# EAGLE board SPIShortcut (EAGLE 6.4)
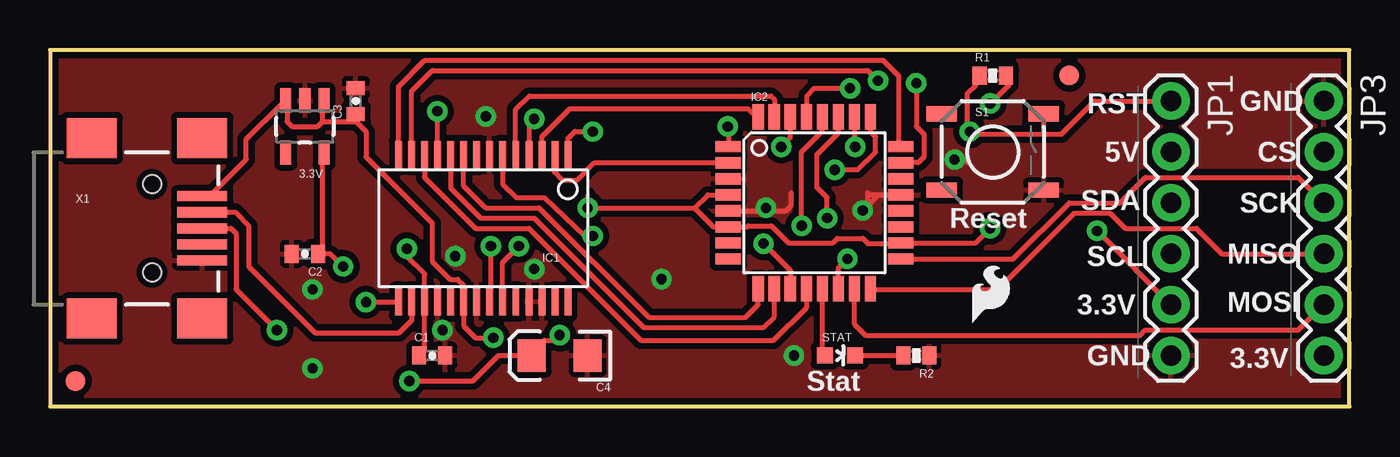
[diagram p0: board, top side]
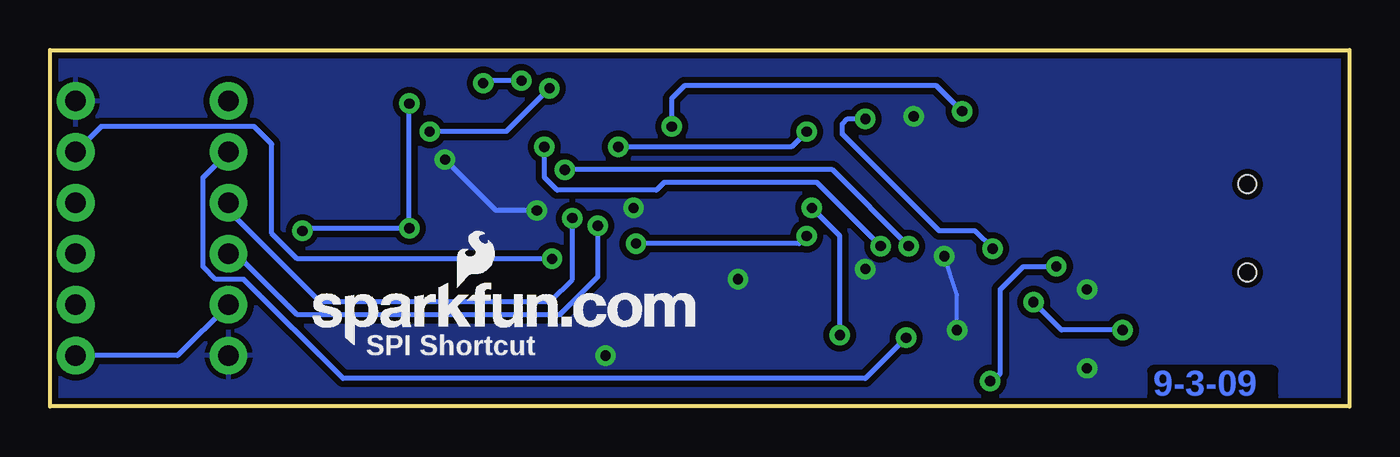
[diagram p1: board, bottom side, seen from below]

Size 64.77 x 17.78 mm. Coordinates in mm from the lower left corner, seen from the top.
Outline: 0,0 64.77,0 64.77,17.78 0,17.78 0,0
Copper layers (1*16): Top 0.035mm / dielectric 1.5mm / Bottom 0.035mm
Design rules "SparkFun": minimum track width 8mil, minimum drill 20mil, track to track 8mil, track to pad 8mil, pad to pad 8mil, via to via 8mil, smd to smd 8mil, copper to edge 9mil, drill to drill 8mil, minimum pad ring 12mil, minimum via ring 10mil, stop-mask expansion 4mil, vias tented up to drill 25mil, thermal gap 10mil

## Footprints (pad centres in the part's own frame; a part is rotated, then mirrored left to right if it is on the bottom)
SOT23-5 = smd 0.55 x 1.2: 1 -0.95,-1.3; 2 0,-1.3; 3 0.95,-1.3; 4 0.95,1.3; 5 -0.95,1.3
0402-CAP = smd 0.7 x 0.9: 1 -0.65,0; 2 0.65,0
EIA3216 = smd 1.4 x 1.6: A 1.4,0; C -1.4,0
SSOP28DB = smd 0.348 x 1.397: 1 -4.225,-3.656; 2 -3.575,-3.656; 3 -2.925,-3.656; 4 -2.275,-3.656; 5 -1.625,-3.656; 6 -0.975,-3.656; 7 -0.325,-3.656; 8 0.325,-3.656; 9 0.975,-3.656; 10 1.625,-3.656; 11 2.275,-3.656; 12 2.925,-3.656; 13 3.575,-3.656; 14 4.225,-3.656; 15 4.225,3.656; 16 3.575,3.656; 17 2.925,3.656; 18 2.275,3.656; 19 1.625,3.656; 20 0.975,3.656; 21 0.325,3.656; 22 -0.325,3.656; 23 -0.975,3.656; 24 -1.625,3.656; 25 -2.275,3.656; 26 -2.925,3.656; 27 -3.575,3.656; 28 -4.225,3.656
TQFP32-08 = smd 1.27 x 0.559: 1 -4.293,2.8; 2 -4.293,2; 3 -4.293,1.2; 4 -4.293,0.4; 5 -4.293,-0.4; 6 -4.293,-1.2; 7 -4.293,-2; 8 -4.293,-2.8; 17 4.293,-2.8; 18 4.293,-2; 19 4.293,-1.2; 20 4.293,-0.4; 21 4.293,0.4; 22 4.293,1.2; 23 4.293,2; 24 4.293,2.8 | smd 0.559 x 1.27: 9 -2.8,-4.293; 10 -2,-4.293; 11 -1.2,-4.293; 12 -0.4,-4.293; 13 0.4,-4.293; 14 1.2,-4.293; 15 2,-4.293; 16 2.8,-4.293; 25 2.8,4.293; 26 2,4.293; 27 1.2,4.293; 28 0.4,4.293; 29 -0.4,4.293; 30 -1.2,4.293; 31 -2,4.293; 32 -2.8,4.293
1X06 = drill 1.016 pad 1.88: 1 0,0; 2 2.54,0; 3 5.08,0; 4 7.62,0; 5 10.16,0; 6 12.7,0
0402-RES = smd 0.7 x 0.9: 1 -0.65,0; 2 0.65,0
TACTILE_SWITCH_SMD = smd 1.524 x 0.762: 1 -2.54,1.905; 2 2.54,1.905; 3 -2.54,-1.905; 4 2.54,-1.905
LED-0603 = smd 0.8 x 0.8: A 0,-0.75; C 0,0.75
FIDUCIAL-1X2 = smd 1 x 1: 1 0,0
USB-MINIB = smd 2.5 x 0.5: D+ 2.5,0; D- 2.5,0.8; GND 2.5,-1.6; ID 2.5,-0.8; VBUS 2.5,1.6 | smd 2.5 x 2: GND@1 -3,-4.5; GND@2 -3,4.5; GND@3 2.5,4.5; GND@4 2.5,-4.5 | hole 0.9: 0,2.2; 0,-2.2

## Placement (x,y rotation side)
3.3V  V_REG_LDOSMD  [SOT23-5]  12.7,13.97 180 top
C1  0.1u  [0402-CAP]  19.05,2.54 0 top
C2  0.1u  [0402-CAP]  12.7,7.62 180 top
C3  10n  [0402-CAP]  15.24,15.24 90 top
C4  10u  [EIA3216]  25.4,2.54 180 top
IC1  FT245RL  [SSOP28DB]  21.59,8.89 180 top
IC2  ATMEGA168  [TQFP32-08]  38.1,10.16 0 top
JP1  [1X06]  55.88,15.24 270 top
JP3  [1X06]  63.5,15.24 270 top
R1  10k  [0402-RES]  46.99,16.51 0 top
R2  330  [0402-RES]  43.18,2.54 180 top
S1  [TACTILE_SWITCH_SMD]  46.99,12.7 0 top
STAT  RED  [LED-0603]  39.37,2.54 270 top
U$3  LOGO-SFENEW  [SFE-NEW-WEBLOGO]  51.69,3.05 0 bottom
U$5  FIDUCIAL1X2  [FIDUCIAL-1X2]  1.27,1.27 0 top
U$6  FIDUCIAL1X2  [FIDUCIAL-1X2]  50.8,16.51 0 top
U$7  LOGO-SFESK  [SFE-LOGO-FLAME]  45.97,4.19 0 top
X1  USBSMD  [USB-MINIB]  5.08,8.89 0 top

## Library data of the parts
3.3V C1-C4 IC1 IC2 JP1 JP3 R1 R2 S1 STAT U$3 U$5-U$7 X1 = SparkFun

## Nets
3.3V: 3.3V.5 C2.1 C4.A IC2.4 IC2.6 IC2.18 JP1.5 JP3.6 R1.2
CS: IC2.14 JP3.2
GND: 3.3V.2 C1.2 C2.2 C3.2 C4.C IC1.7 IC1.18 IC1.21 IC1.25 IC1.26 IC2.3 IC2.5 IC2.21 JP1.6 JP3.1 R2.1 S1.4 X1.GND
IOVDD: C1.1 IC1.4 IC1.17
MISO: IC2.16 JP3.4
MOSI: IC2.15 JP3.5
N$1: IC1.1 IC2.30
N$2: IC1.5 IC2.31
N$3: IC1.3 IC2.32
N$4: IC1.11 IC2.1
N$5: IC1.2 IC2.2
N$6: IC1.9 IC2.9
N$7: IC1.10 IC2.10
N$8: IC1.6 IC2.11
N$9: IC1.23 IC2.26
N$10: IC1.16 X1.D-
N$11: IC1.15 X1.D+
N$12: IC1.22 IC2.25
N$13: IC1.14 IC2.24
N$14: IC1.13 IC2.23
N$15: IC1.12 IC2.12
N$16: IC2.13 STAT.A
N$17: R2.2 STAT.C
RESET: IC2.29 JP1.1 R1.1 S1.2
SCK: IC2.17 JP3.3
SCL: IC2.28 JP1.4
SDA: IC2.27 JP1.3
VUSB: 3.3V.1 3.3V.3 C3.1 IC1.20 JP1.2 X1.VBUS

## Tracks (layer width: path | path; a pad name or v marks a point on that pad's centre or on a via)
3.3V  (via drill 0.51)
  Top 0.203: v26.8,9.91 26.8,10.56
  Top 0.254: 3.3V.5 13.59,12.61 13.59,7.87 13.34,7.62 C2.1 13.97,7.62 v14.61,6.99 | R1.2 47.62,16.76 | v46.86,8.89 46.13,8.16 IC2.18 42.42,8.13 40.77,8.13 40.51,8.38 39.24,8.38 39.02,8.16 36.81,8.16 35.95,9.02 34.8,9.02 34.74,8.96 IC2.6 33.08,8.96 32.13,9.91 | R1.2 47.88,16.76 | v25.4,3.56 25.4,3.3 24.64,3.3 C4.A 22.35,2.54 21.08,1.27 v17.91,1.27 | 27.05,9.91 v26.8,9.91 32.13,9.91 | v52.2,8.76 JP1.5 | R1.2 47.84,16.09 v46.86,15.11 | IC2.4 32.78,10.56 32.13,9.91
  Bottom 0.254: v46.86,15.11 v46.86,8.89 52.07,8.89 v52.2,8.76 | v25.4,3.56 25.4,8.51 v26.8,9.91 | JP3.6 58.42,2.54 JP1.5 | v14.61,6.99 16.26,6.99 17.4,5.84 17.4,1.65 17.65,1.4 | 17.65,1.4 17.78,1.27 | v17.91,1.27 17.78,1.4 17.65,1.4
CS  (via drill 0.51)
  Top 0.254: IC2.14 39.3,6.92 v39.75,7.37
  Bottom 0.254: v39.75,7.37 52.45,7.37 53.72,8.64 53.72,13.08 54.61,13.97 62.23,13.97 JP3.2
GND  (via drill 0.51)
  Top 0.254: IC2.5 36.68,9.76 36.96,10.03 36.96,10.67 | v45.09,12.32 45.59,12.32 45.72,12.19 | 41.29,10.56 IC2.21 40.88,10.56 40.77,10.67 40.77,10.03 v40.51,9.78 41.29,10.56
  Bottom 0.203: v19.56,3.81 19.56,5.59 v20.19,7.49
  Bottom 0.254: v40.51,9.78 42.55,9.78 v45.09,12.32
  other vias: 13.08,5.84 13.08,1.91 24.13,6.86 21.72,14.48 35.69,9.91 30.48,6.35 37.08,2.54
  pour Bottom (isolate 0.305): 0,17.78 64.77,17.78 64.77,0 0,0
  pour Top (isolate 0.305): 0,17.78 64.77,17.78 64.77,0 0,0
IOVDD  (via drill 0.51)
  Top 0.254: C1.1 18.41,2.54 18.66,2.79 IC1.17 18.66,5.21 18.67,5.21 18.67,6.6 17.78,7.49 v17.78,7.87 | IC1.4 23.86,14.09 v24.13,14.35
  Bottom 0.254: v24.13,14.35 25.02,14.35 25.27,14.1 25.27,13.59 20.45,8.76 18.67,8.76 v17.78,7.87
MISO
  Top 0.254: JP3.4 58.42,7.62 57.15,8.89 53.59,8.89 52.83,9.65 51.05,9.65 47.24,5.84 41.02,5.84 41,5.87 IC2.16
MOSI
  Top 0.254: IC2.15 40.1,4.1 40.64,3.56 54.36,3.56 54.61,3.81 62.23,3.81 JP3.5
N$1  (via drill 0.51)
  Top 0.254: IC2.30 36.9,13.4 v36.45,12.95 | v27.05,13.72 26.16,13.72 25.82,13.37 IC1.1
  Bottom 0.254: v36.45,12.95 27.81,12.95 v27.05,13.72
N$2
  Top 0.254: IC2.31 36.1,15.34 35.94,15.49 23.88,15.49 23.21,14.83 IC1.5
N$3
  Top 0.254: IC1.3 24.52,12.57 24.51,12.57 24.51,13.46 25.91,14.86 34.8,14.86 35.2,14.45 IC2.32
N$4  (via drill 0.51)
  Top 0.254: IC2.1 33.81,13.95 v33.78,13.97 | IC1.11 19.32,14.72 v19.3,14.73
  Bottom 0.254: v33.78,13.97 33.78,15.37 33.15,16 20.57,16 v19.3,14.73
N$5
  Top 0.254: IC2.2 27.15,12.16 26.29,11.3 25.53,11.3 25.15,11.68 25.15,12.45 25.16,12.46 IC1.2
N$6
  Top 0.254: IC1.9 20.61,11.01 21.72,9.91 24.38,9.91 29.84,4.45 34.67,4.45 35.3,5.07 IC2.9
N$7
  Top 0.254: IC1.10 19.96,10.9 21.46,9.4 24.13,9.4 29.59,3.94 35.56,3.94 36.1,4.48 IC2.10
N$8  (via drill 0.51)
  Top 0.254: 36.83,5.71 36.96,5.84 36.93,5.87 IC2.11 36.9,6.79 v35.56,8.13 | IC1.6 22.57,11.09 23.24,10.41 24.64,10.41 26.67,8.51 v27.05,8.51
  Bottom 0.254: v35.56,8.13 27.43,8.13 v27.05,8.51
N$9  (via drill 0.51)
  Top 0.254: IC1.23 22.57,7.2 v23.37,8 | IC2.26 40.1,14.38 40.13,14.35 v40.13,12.95
  Bottom 0.254: v23.37,8 26.54,11.18 34.16,11.18 34.54,10.79 39.5,10.79 40.13,11.43 v40.13,12.95
N$10
  Top 0.254: X1.D- 9.23,9.69 9.91,9.02 9.91,6.99 13.21,3.68 17.4,3.68 18.03,4.32 18.03,5.08 18.02,5.1 IC1.16
N$11  (via drill 0.51)
  Top 0.254: X1.D+ 9.02,8.89 9.27,8.64 9.27,5.84 v11.3,3.81 | IC1.15 17.4,5.21 v15.75,5.21
  Bottom 0.254: v11.3,3.81 14.35,3.81 v15.75,5.21
N$12  (via drill 0.51)
  Top 0.254: IC1.22 21.97,5.29 v21.97,8 | v39.12,11.81 40.26,11.81 41.15,12.7 41.15,13.46 40.89,13.72 40.89,14.48 40.9,14.47 IC2.25
  Bottom 0.254: v21.97,8 25.78,11.81 v39.12,11.81
N$13
  Top 0.254: IC1.14 17.36,15.97 18.67,17.27 41.53,17.27 42.29,16.51 42.29,13.08 42.41,12.96 | 42.41,12.96 42.42,12.95 | 42.41,12.96 IC2.24
N$14  (via drill 0.51)
  Top 0.254: IC1.13 18.02,15.73 19.05,16.76 40.77,16.76 v41.27,16.26 | IC2.23 43.27,12.16 43.56,12.45 43.56,13.59 43.18,13.97 v43.18,16.13
  Bottom 0.254: v41.27,16.26 43.05,16.26 v43.18,16.13
N$15
  Top 0.254: IC1.12 18.66,11.43 21.21,8.89 23.88,8.89 29.46,3.3 36.07,3.3 37.72,4.95 37.72,5.84 IC2.12
N$16
  Top 0.254: IC2.13 38.5,2.9 38.73,2.67 38.62,2.55 38.62,2.42 | 38.62,2.42 STAT.A | 38.62,2.42 38.61,2.41
N$17
  Top 0.254: STAT.C R2.2
RESET  (via drill 0.51)
  Top 0.254: v39.88,15.88 38.1,15.88 37.72,15.49 37.72,14.61 37.59,14.48 37.62,14.45 IC2.29 | JP1.1 52.07,15.24 50.42,13.59 49.53,13.59 | R1.1 46.14,16.04 45.72,15.62 45.72,13.84 v45.85,13.72 45.97,13.59 49.53,13.59 | 49.53,13.59 S1.2
  Bottom 0.254: v45.85,13.72 42.04,13.72 v39.88,15.88
SCK
  Top 0.254: IC2.17 48,7.36 50.8,10.16 53.34,10.16 54.61,11.43 62.23,11.43 63.37,10.29 63.37,10.16 JP3.3
SCL  (via drill 0.51)
  Top 0.254: IC2.28 38.5,13.73 37.47,12.7 v37.47,9.02
  Bottom 0.254: v37.47,9.02 37.47,6.48 39.37,4.57 44.7,4.57 | 44.7,4.57 44.83,4.57 | 44.7,4.57 52.45,4.57 55.5,7.62 JP1.4
SDA  (via drill 0.51)
  Top 0.254: IC2.27 39.3,13.65 38.23,12.57 38.23,10.92 38.73,10.41 v38.73,9.4
  Bottom 0.254: v38.73,9.4 38.73,6.35 39.81,5.27 | 39.81,5.27 39.88,5.21 | JP1.3 55.88,9.78 51.31,5.21 39.75,5.21 39.81,5.27
VUSB  (via drill 0.51)
  Top 0.254: X1.VBUS 7.95,10.49 9.78,12.32 9.78,13.34 11.56,15.11 | 11.75,15.31 11.81,15.37 | 11.75,15.31 3.3V.3 | 11.56,15.11 11.75,15.31 | 11.56,15.11 11.59,15.11 3.3V.3 | 3.3V.1 13.59,15.21 13.59,14.22 | 13.59,14.22 13.34,13.97 12.06,13.97 11.81,14.22 11.81,14.99 11.68,15.11 11.75,15.18 3.3V.3 | v22.1,3.43 21.21,3.43 20.61,4.02 IC1.20 20.61,5.29 20.57,5.33 20.57,6.1 20.32,6.35 19.94,6.35 19.05,7.24 19.05,9.14 15.75,12.45 15.75,13.72 15.11,14.35 15.15,14.39 C3.1 15.24,14.22 13.59,14.22
  Bottom 0.254: v22.1,3.43 24.13,1.4 50.16,1.4 55.12,6.35 56.52,6.35 57.15,6.99 57.15,11.43 JP1.2

## Text on the board
Bottom: 9-3-09
tPlace: RST | GND | 5V | CS | SDA | SCK | Reset | SCL | MISO | 3.3V | MOSI | GND | 3.3V | Stat
bPlace: SPI Shortcut